# EAGLE board Projeto de Circuitos Eletrônicos IoT  (EAGLE 9.7.0)

Size 306.25 x 162.62 mm. Coordinates in mm from the lower left corner, seen from the top.
Outline: 0,0 306.25,0 306.25,162.62 0,162.62 0,0
Copper layers (1*16): Top 0.035mm / dielectric 1.5mm / Bottom 0.035mm
Design rules "default": minimum track width 6mil, minimum drill 0.35mm, track to track 6mil, track to pad 6mil, pad to pad 6mil, via to via 6mil, smd to smd 6mil, copper to edge 40mil, drill to drill 6mil, minimum pad ring 10mil, minimum via ring 8mil, stop-mask expansion 4mil, vias tented up to drill 0mil, thermal gap 10mil

## Footprints (pad centres in the part's own frame; a part is rotated, then mirrored left to right if it is on the bottom)
BATTERY-GENERIC = drill 1.118 pad 3.15 octagon: + 2.54,0; - -2.54,0
LEDRD254W60D565H860B = drill 0.981 pad 1.581: 1 -1.27,0; 2 1.27,0
DIODE-AXIAL = drill 1: 1 -5.08,0; 2 5.08,0
KS2E-M-DC5 = drill 0.8: 1 -8.89,-3.81; 4 -1.27,-3.81; 6 3.81,-3.81; 8 8.89,-3.81; 9 8.89,3.81; 11 3.81,3.81; 13 -1.27,3.81; 16 -8.89,3.81
MOTOR = drill 1.118 pad 3.15 octagon: + 2.54,0; - -2.54,0
PIEZO = drill 1 pad 1.6: 1 -3.5,0; 2 3.5,0
RESAD1016W63L850D250B = drill 0.83 pad 1.43: 1 -5.08,0; 2 5.08,0
HA-06-SM065 = drill 1 pad 1.676: 1 -2.54,-2.54; 2 0,2.54; 3 2.54,-2.54
TO92 = drill 0.813 octagon: 1 -1.27,0; 2 0,1.905; 3 1.27,0
ARDUINO-UNO-R3-SHIELD = drill 1.016 pad 1.88: 3.3V 24.13,-2.54; 5V 24.13,0; A0 24.13,12.7; A1 24.13,15.24; A2 24.13,17.78; A3 24.13,20.32; A4 24.13,22.86; A5 24.13,25.4; AREF -24.13,-13.97; D2 -24.13,20.32; D3 -24.13,17.78; D4 -24.13,15.24; D5 -24.13,12.7; D6 -24.13,10.16; D7 -24.13,7.62; D8 -24.13,3.81; D9 -24.13,1.27; D10 -24.13,-1.27; D11 -24.13,-3.81; D12 -24.13,-6.35; D13 -24.13,-8.89; GND@0 24.13,2.54; GND@1 24.13,5.08; GND@2 -24.13,-11.43; IOREF 24.13,-7.62; NC 24.13,-10.16; RES 24.13,-5.08; RX -24.13,25.4; SCL -24.13,-19.05; SDA -24.13,-16.51; TX -24.13,22.86; VIN 24.13,7.62
JHD-162A = drill 1.016 long: 1 -19.05,0; 2 -16.51,0; 3 -13.97,0; 4 -11.43,0; 5 -8.89,0; 6 -6.35,0; 7 -3.81,0; 8 -1.27,0; 9 1.27,0; 10 3.81,0; 11 6.35,0; 12 8.89,0; 13 11.43,0; 14 13.97,0; 15 16.51,0; 16 19.05,0

## Placement (x,y rotation side)
BAT1  9V  [BATTERY-GENERIC]  251.78,21.99 90 top
D1  RED  [LEDRD254W60D565H860B]  141.59,129.01 180 top
D2  DIODEDIODE-AXIAL  [DIODE-AXIAL]  245.53,130.17 270 top
K2  RELAY-DPDT_KS2E  [KS2E-M-DC5]  268.95,135.96 180 top
M1  MOTOR_HDR  [MOTOR]  298,126.21 0 top
PIEZO1  PIEZO  [PIEZO]  182.23,131.55 0 top
R1  330  [RESAD1016W63L850D250B]  142.86,116.31 90 top
R2  1k  [RESAD1016W63L850D250B]  201.28,88.37 90 top
R3  1k  [RESAD1016W63L850D250B]  236,153.65 90 top
RPOT1  10k  [HA-06-SM065]  203.82,106.15 0 top
T1  NPN  [TO92]  235.48,135.35 180 top
U1  ARDUINO-UNO-R3-SHIELD  [ARDUINO-UNO-R3-SHIELD]  47.88,93.74 270 top
U2  TMP36GT9Z_TO92  [TO92]  163.18,131.55 0 top
U3  LCD-16X2JHD-162A  [JHD-162A]  86.09,36.63 0 top

## Library data of the parts
BAT1 D2 K2 M1 PIEZO1 R1-R3 RPOT1 U1-U3 = Tinkercad
D1 = Tinkercad; CATEGORY: Opto-Electronic; SUB-CATEGORY: LED; VALUE: LED_RED
T1 = Tinkercad; CATEGORY: Transistor; SUB-CATEGORY: BJT; TYPE: NPN

## Nets
BAT1+: BAT1.+ K2.13
BAT1-: BAT1.- M1.-
D1_A: D1.1 R1.2
M1_+: K2.9 M1.+
T1_B: R3.1 T1.2
T1_C: D2.1 K2.1 T1.1
U1_5V: D2.2 K2.16 R2.2 RPOT1.3 U1.5V U2.3 U3.2
U1_A0: U1.A0 U2.2
U1_D2: U1.D2 U3.14
U1_D3: U1.D3 U3.13
U1_D4: U1.D4 U3.12
U1_D5: U1.D5 U3.11
U1_D6: R1.1 U1.D6
U1_D7: PIEZO1.1 U1.D7
U1_D8: R3.2 U1.D8
U1_D11: U1.D11 U3.6
U1_D12: U1.D12 U3.4
U1_GND: D1.2 PIEZO1.2 RPOT1.1 T1.3 U1.GND@0 U1.GND@1 U1.GND@2 U2.1 U3.1 U3.5 U3.16
U3_LED+: R2.1 U3.15
U3_VO: RPOT1.2 U3.3

## Tracks (layer width: path | path; a pad name or v marks a point on that pad's centre or on a via)
BAT1+  (1 unrouted)
BAT1-  (1 unrouted)
D1_A  (1 unrouted)
M1_+  (1 unrouted)
T1_B  (1 unrouted)
T1_C  (2 unrouted)
U1_5V  (6 unrouted)
U1_A0  (1 unrouted)
U1_D2  (1 unrouted)
U1_D3  (1 unrouted)
U1_D4  (1 unrouted)
U1_D5  (1 unrouted)
U1_D6  (1 unrouted)
U1_D7  (1 unrouted)
U1_D8  (1 unrouted)
U1_D11  (1 unrouted)
U1_D12  (1 unrouted)
U1_GND  (10 unrouted)
U3_LED+  (1 unrouted)
U3_VO  (1 unrouted)